# EAGLE board node (EAGLE 6.4)
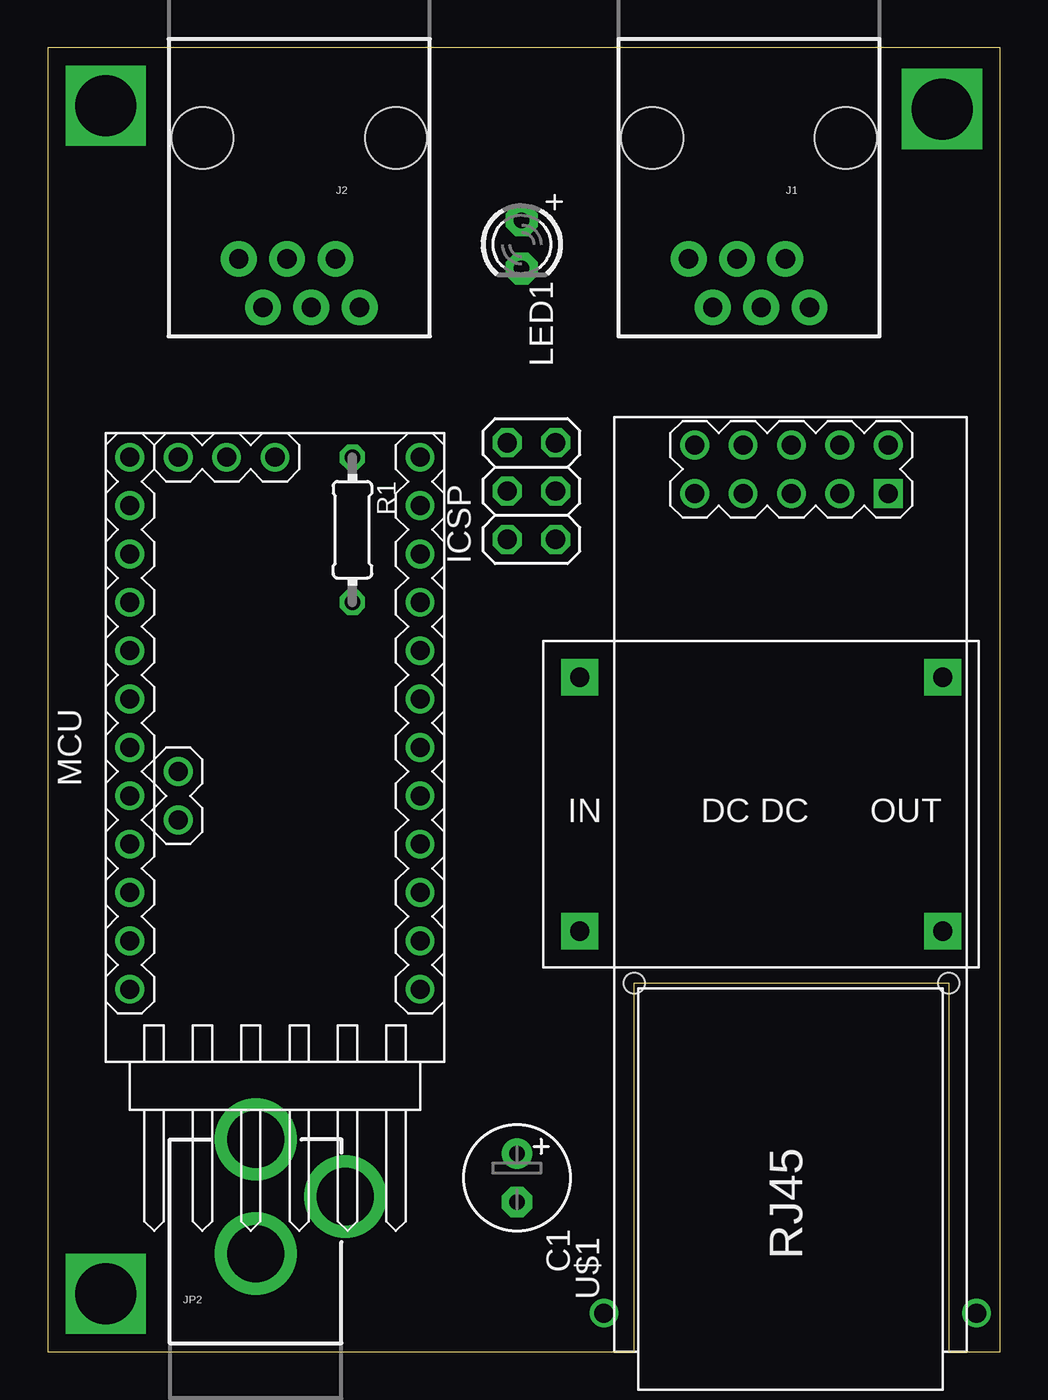
[diagram p0: board, top side]
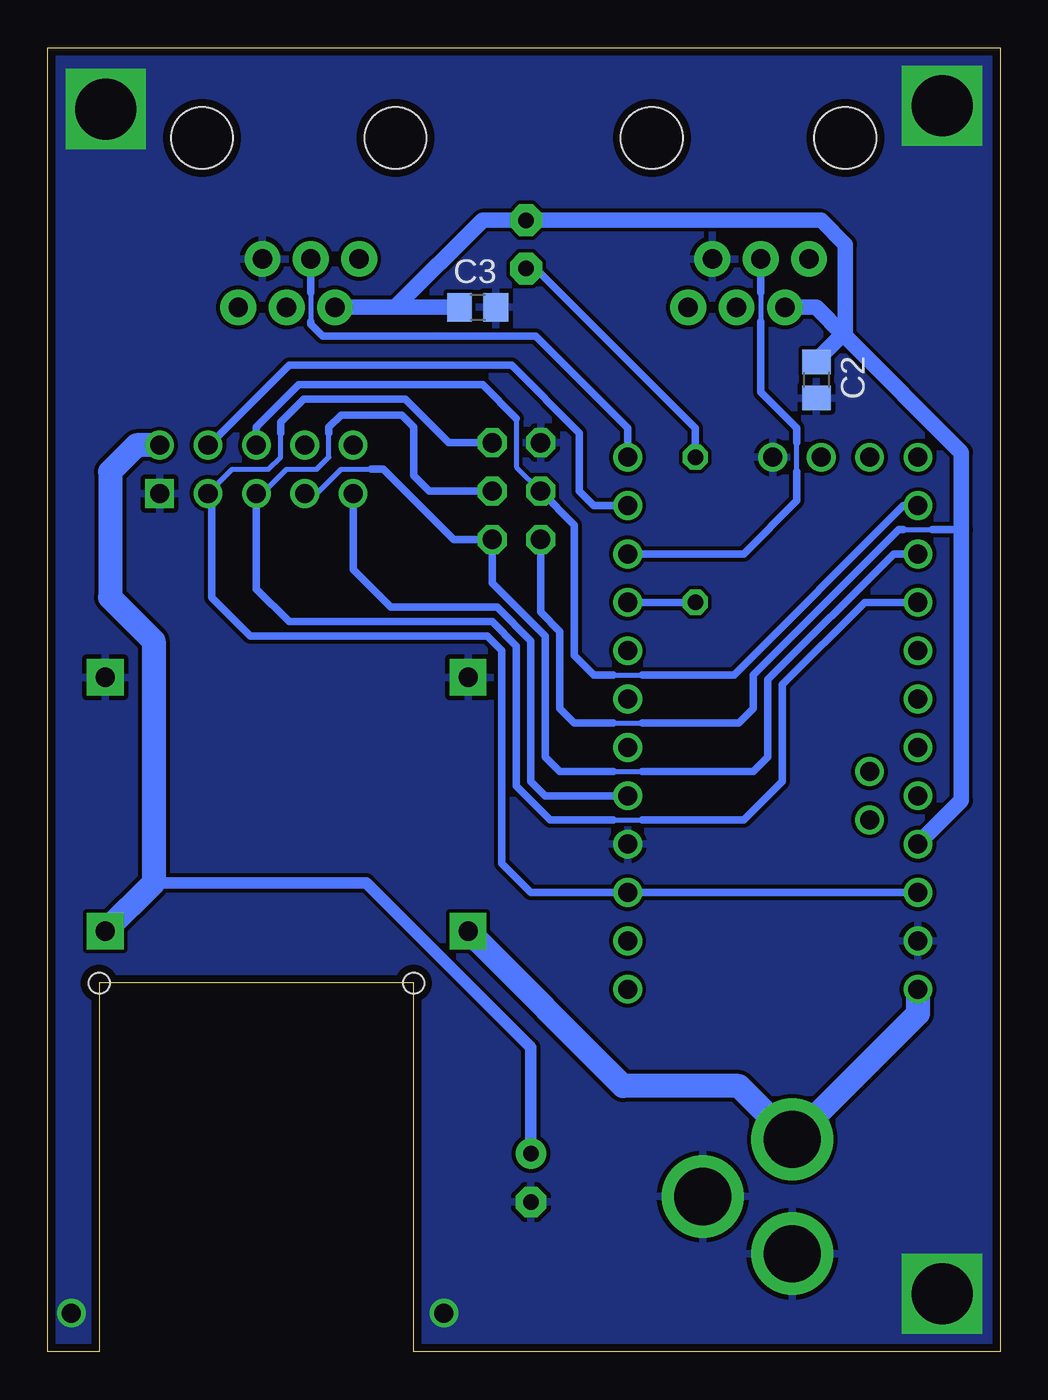
[diagram p1: board, bottom side, seen from below]

Size 50.01 x 68.5 mm. Coordinates in mm from the lower left corner, seen from the top.
Outline: 0,0 30.8,0 30.8,19.37 47.31,19.37 47.31,0 50.01,0 50.01,68.5 0,68.5 0,0
Copper layers (1*16): Top 0.035mm / dielectric 1.5mm / Bottom 0.035mm
Design rules "plosnaky_cz": minimum track width 10mil, minimum drill 10mil, track to track 8mil, track to pad 8mil, pad to pad 8mil, via to via 8mil, smd to smd 8mil, copper to edge 16mil, drill to drill 8mil, minimum pad ring 10mil, minimum via ring 8mil, stop-mask expansion 4mil, vias tented up to drill 0mil, thermal gap 10mil
Holes 1.1 mm at 30.8,19.37 47.31,19.37

## Footprints (pad centres in the part's own frame; a part is rotated, then mirrored left to right if it is on the bottom)
E2,5-6 = drill 0.813 pad 1.6: + -1.27,0 | drill 0.813 pad 1.6 octagon: - 1.27,0
C0805 = smd 1.3 x 1.5: 1 -0.95,0; 2 0.95,0
2X03 = drill 1.016 octagon: 1 -2.54,-1.27; 2 -2.54,1.27; 3 0,-1.27; 4 0,1.27; 5 2.54,-1.27; 6 2.54,1.27
RJ11-6 = drill 1.016 pad 1.88: 1 -3.175,8.89; 2 -1.905,6.35; 3 -0.635,8.89; 4 0.635,6.35; 5 1.905,8.89; 6 3.175,6.35 | hole 3.251: -5.08,0; 5.08,0
POWER_JACK_PTH = drill 2.997 pad 4.318: GND 0,7.7; GNDBREAK 4.7,10.7; PWR 0,13.7
LED3MM = drill 0.813 pad 1.676 octagon: A -1.27,0; K 1.27,0
ARDUINO-PRO-MINI#APC = drill 1: J2.1 -1.27,5.08; J2.2 -3.81,5.08; J3.1 15.24,0; J3.2 15.24,2.54; J3.3 15.24,5.08; J6.1 -12.7,7.62; J6.2 -10.16,7.62; J6.3 -7.62,7.62; J6.4 -5.08,7.62; J6.5 -2.54,7.62; J6.6 0,7.62; J6.7 2.54,7.62; J6.8 5.08,7.62; J6.9 7.62,7.62; J6.10 10.16,7.62; J6.11 12.7,7.62; J6.12 15.24,7.62; J7.1 15.24,-7.62; J7.2 12.7,-7.62; J7.3 10.16,-7.62; J7.4 7.62,-7.62; J7.5 5.08,-7.62; J7.6 2.54,-7.62; J7.7 0,-7.62; J7.8 -2.54,-7.62; J7.9 -5.08,-7.62; J7.10 -7.62,-7.62; J7.11 -10.16,-7.62; J7.12 -12.7,-7.62
0204/7 = drill 0.813 octagon: 1 -3.81,0; 2 3.81,0
ETHERNET-ENC28J60-MINI = drill 1: CLKOUT 47.625,14.287; CS 47.625,6.668; INT 45.085,14.287; RST 45.085,6.668; SCK 45.085,9.207; SI 47.625,9.207; SO 45.085,11.748; VCC 47.625,4.128; WOL 47.625,11.748 | drill 1 square: GND 45.085,4.128
DC-DC = drill 1 pad 1.93 square: P$1 1.27,1.27; P$2 20.32,1.27; P$3 1.27,14.605; P$4 20.32,14.605

## Placement (x,y rotation side)
C1  [E2,5-6]  24.64,9.14 270 top
C2  100nF  [C0805]  9.65,51.05 270 bottom
C3  100nF  [C0805]  27.43,54.86 0 bottom
ICSP  [2X03]  25.4,45.21 90 top
J1  RJ11  [RJ11-6]  36.83,63.75 180 top
J2  RJ11  [RJ11-6]  13.21,63.75 180 top
JP2  POWER_JACKPTH  [POWER_JACK_PTH]  10.92,-2.54 0 top
LED1  [LED3MM]  24.89,58.17 270 top
MCU  ARDUINO-PRO-MINI-5.0V#APC  [ARDUINO-PRO-MINI#APC]  11.94,31.75 90 top
R1  [0204/7]  16,43.18 270 top
U$1  ETHERNET-ENC28J60-MINI  [ETHERNET-ENC28J60-MINI]  48.26,0 90 top
U$2  DC-DC-SMALL  [DC-DC]  26.67,20.83 0 top

## Library data of the parts
C1-C3 R1 = rcl
ICSP = pinhead
J1 J2 = SparkFun-Connectors; PROD_ID: CONN-08590
JP2 = SparkFun-Connectors; PROD_ID: CONN-08197
LED1 = adafruit
MCU U$1 = diy-modules
U$2 = OK1CDJ-E6

## Nets
+3V3: C1.+ U$1.VCC U$2.P$2
+5V: C2.1 C3.1 ICSP.2 J1.5 J2.5 LED1.A MCU.J6.4
DHT0_SIG: J1.4 MCU.J7.1
DHT1_SIG: J2.4 MCU.J7.3
ENC28J60_CS: MCU.J7.2 U$1.CS
ENC28J60_DATA_INT: MCU.J7.8 U$1.INT
GND: C1.- C2.2 C3.2 ICSP.6 J1.2 J2.2 JP2.GND JP2.GNDBREAK MCU.J3.1 MCU.J6.2 MCU.J7.9 U$1.GND U$2.P$3 U$2.P$4
LED_SINK: MCU.J7.4 R1.2
MISO: ICSP.1 MCU.J6.10 U$1.SO
MOSI: ICSP.4 MCU.J6.11 U$1.SI
N$1: LED1.K R1.1
RESET: ICSP.5 MCU.J6.3 MCU.J7.10 U$1.RST
SCK: ICSP.3 MCU.J6.9 U$1.SCK
VIN: JP2.PWR MCU.J6.1 U$2.P$1

## Tracks (layer width: path | path; a pad name or v marks a point on that pad's centre or on a via)
+3V3
  Bottom 0.61: 44.45,24.64 33.27,24.64 24.64,16 C1.+
  Bottom 1.27: U$1.VCC 45.34,47.62 46.74,46.23 46.74,39.62 44.45,37.34 44.45,24.64 U$2.P$2
+5V
  Bottom 0.254: 5.08,43.18 3.56,43.18 | 20.32,33.02 18.8,33.02
  Bottom 0.406: ICSP.2 24.13,38.86 23.11,37.85 23.11,33.78 22.35,33.02 20.32,33.02 | 5.08,43.18 5.33,43.18 12.95,35.56 12.95,33.78 13.72,33.02 18.8,33.02 | 3.56,43.18 2.03,43.18
  Bottom 0.813: MCU.J6.4 2.03,28.96 2.03,43.18 2.03,47.24 8.13,53.34 | 8.13,53.34 8.13,58.17 9.4,59.44 LED1.A 27.18,59.44 31.75,54.86 | 31.75,54.86 J1.5 | J2.5 9.65,54.86 8.26,53.47 | 8.26,53.47 8.13,53.34 | C3.1 31.75,54.86 | C2.1 9.65,52.07 8.26,53.47
DHT0_SIG
  Bottom 0.254: 36.2,55.63 36.2,54.1
  Bottom 0.406: J1.4 36.2,55.63 | 36.2,54.1 36.2,53.98 35.56,53.34 24.38,53.34 19.56,48.51 MCU.J7.1
DHT1_SIG
  Bottom 0.254: 10.67,46.23 10.67,47.75 | 12.57,55.63 12.57,54.1
  Bottom 0.406: MCU.J7.3 13.46,41.91 10.67,44.7 10.67,46.23 | 10.67,47.75 10.67,48.51 12.57,50.42 12.57,54.1 | J2.4 12.57,55.63
ENC28J60_CS
  Bottom 0.406: U$1.CS 41.53,47.62 37.34,51.82 25.65,51.82 22.1,48.26 22.1,45.21 21.34,44.45 MCU.J7.2
ENC28J60_DATA_INT
  Bottom 0.406: U$1.INT 33.97,41.08 32,39.12 26.42,39.12 24.64,37.34 24.64,29.97 23.88,29.21 MCU.J7.8
GND  (via drill 1, 3.2)
  other vias: 3.05,3.05 29.21,2.03 48.77,2.03 3.05,65.46 46.96,65.28
  pour Bottom: -0.25,68.83 0,-0.25 50.29,-0.25 50.29,68.83
LED_SINK
  Bottom 0.406: MCU.J7.4 R1.2
MISO
  Bottom 0.254: U$1.SO 35.88,45.09 34.61,46.35 33.02,46.35 | 20.32,30.48 18.8,30.48
  Bottom 0.406: 33.02,46.35 32.38,46.35 28.7,42.67 ICSP.1 26.67,40.39 23.88,37.59 23.88,31.24 23.11,30.48 20.32,30.48 | MCU.J6.10 5.59,41.91 12.19,35.31 12.19,31.24 12.95,30.48 18.8,30.48
MOSI
  Bottom 0.254: 25.4,49.02 25.4,46.48 ICSP.4 | 20.32,35.56 18.8,35.56
  Bottom 0.406: U$1.SI 39.05,48.58 36.83,50.8 27.18,50.8 25.4,49.02 | MCU.J6.11 5.08,44.45 13.97,35.56 18.8,35.56 | 20.32,35.56 21.34,35.56 22.35,36.58 22.35,43.43 ICSP.4
N$1
  Bottom 0.406: R1.1 16,48.51 24.38,56.9 LED1.K
RESET
  Bottom 0.254: U$1.RST 40.32,46.35 38.42,46.35 37.78,46.99 37.78,48.26
  Bottom 0.406: U$1.RST 41.4,44.9 41.4,39.62 39.37,37.59 26.92,37.59 26.16,36.83 26.16,25.65 24.64,24.13 MCU.J7.10 MCU.J6.3 | 37.78,48.26 37.78,48.83 36.58,50.04 31.24,50.04 28.96,47.75 ICSP.5
SCK
  Bottom 0.254: 35.24,48.26 35.24,46.99 35.88,46.35 37.47,46.35 38.73,45.09 U$1.SCK | 20.32,27.94 18.8,27.94
  Bottom 0.406: U$1.SCK 39.05,40.07 37.34,38.35 26.67,38.35 25.4,37.08 25.4,29.72 23.62,27.94 20.32,27.94 | 35.24,48.26 35.24,48.58 34.61,49.21 31.43,49.21 30.8,48.58 30.8,46.04 29.97,45.21 ICSP.3 | MCU.J6.9 7.11,39.37 11.43,35.05 11.43,29.97 13.46,27.94 18.8,27.94
VIN
  Bottom 1.27: MCU.J6.1 4.32,17.76 JP2.PWR 10.92,11.18 13.72,13.97 19.81,13.97 U$2.P$1